# EAGLE board controller (EAGLE 9.6.0)
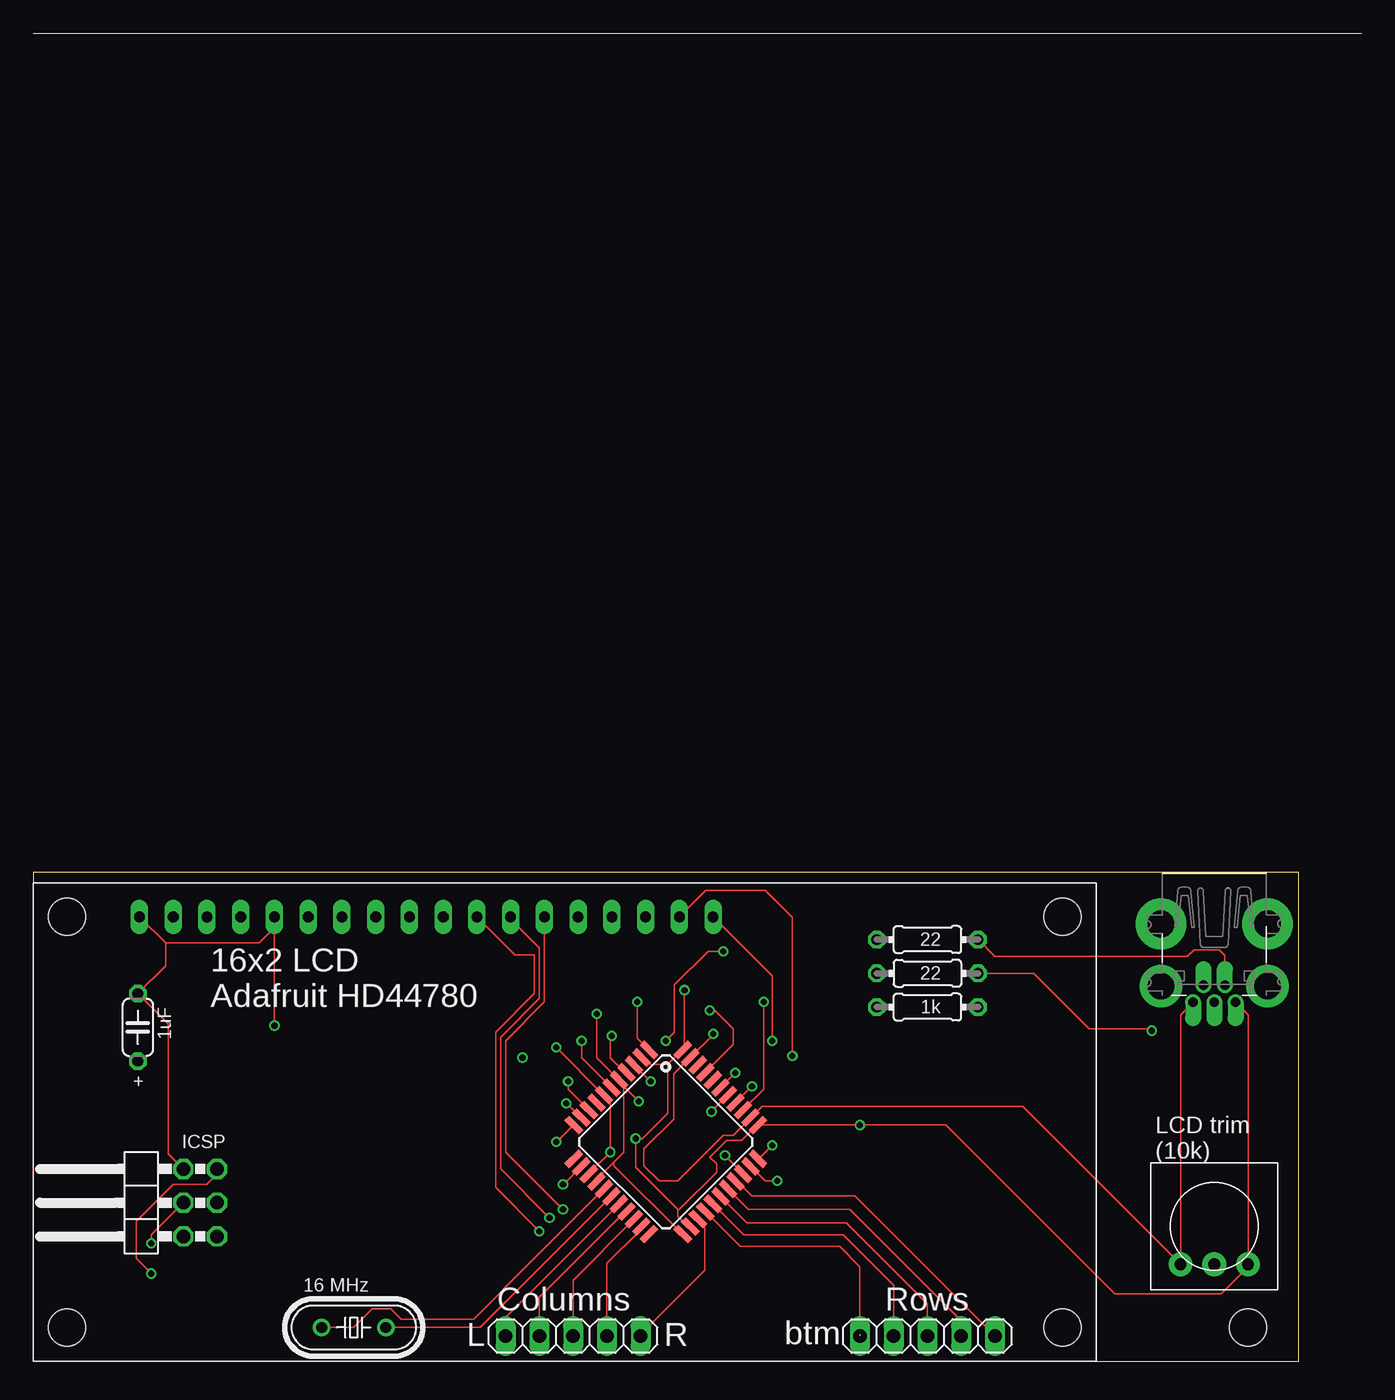
[diagram p0: board, top side]
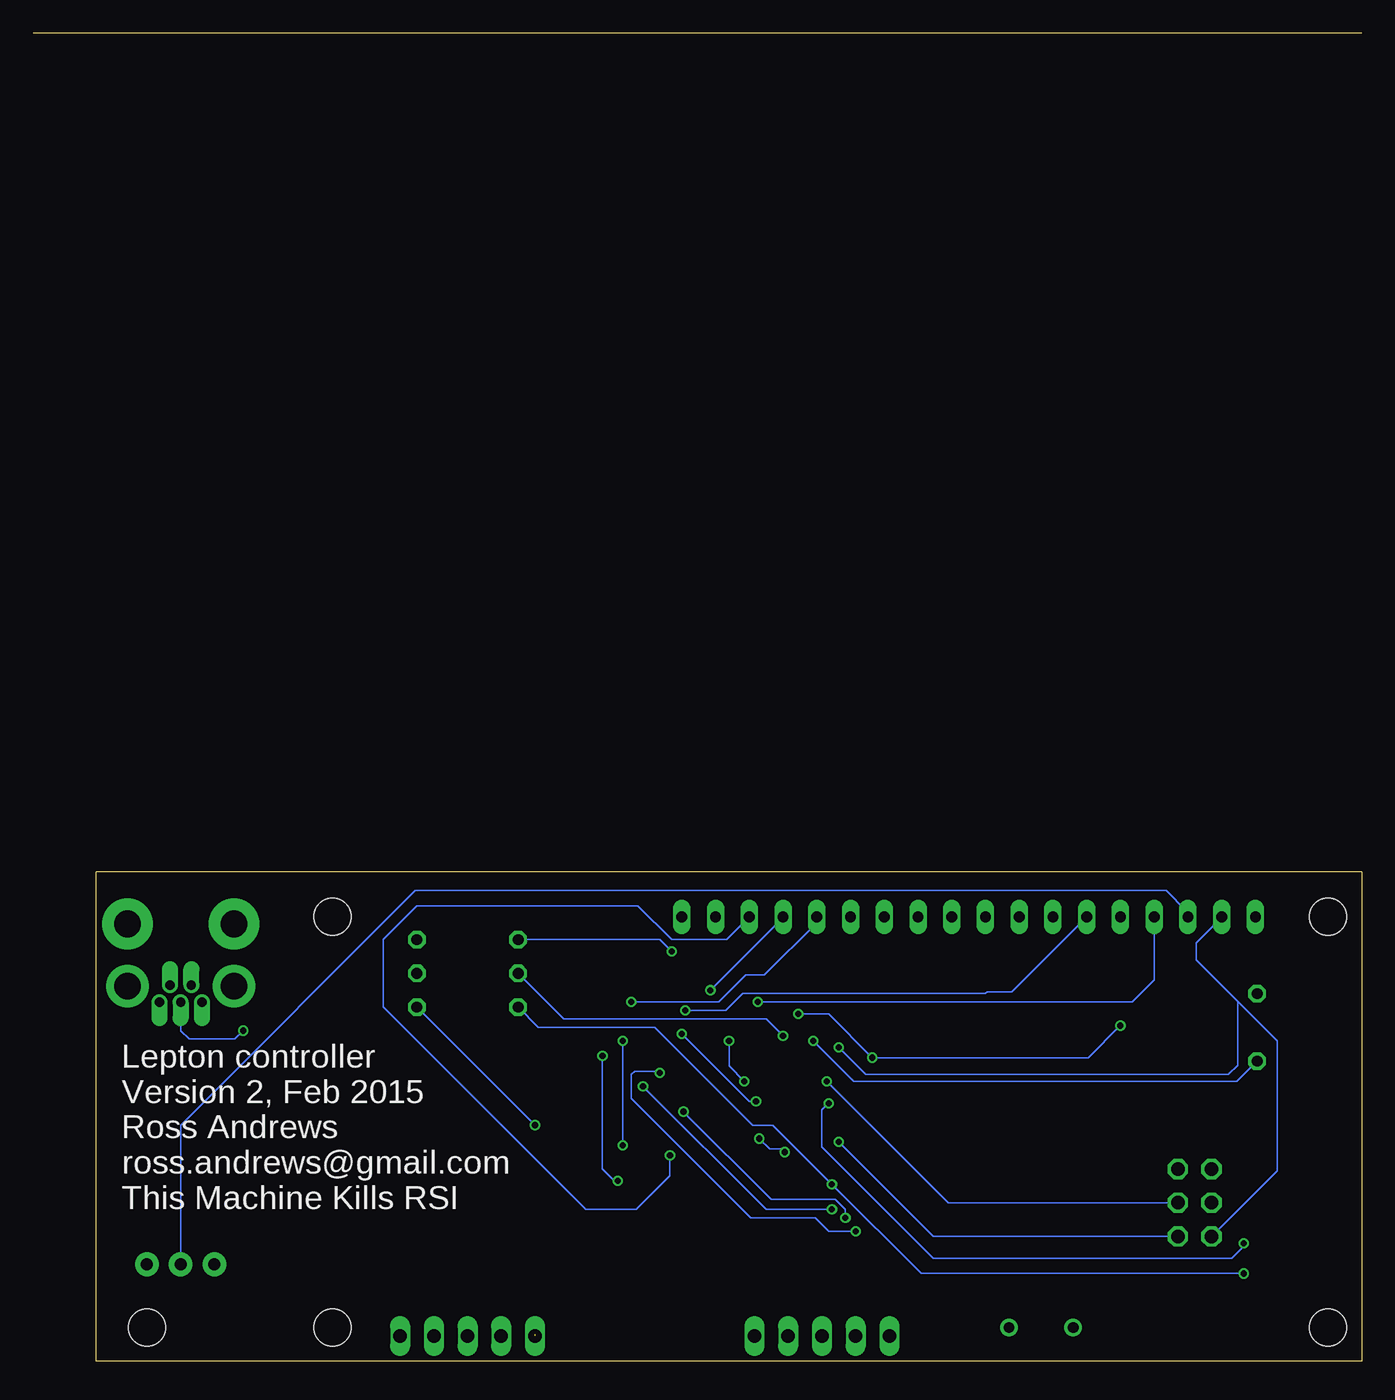
[diagram p1: board, bottom side, seen from below]

Size 100 x 100 mm. Coordinates in mm from the lower left corner, seen from the top.
Outline: 0,100 100,100
Outline: 0,0 95.25,0 95.25,36.83 0,36.83 0,0
Copper layers (1*16): Top 0.035mm / dielectric 1.5mm / Bottom 0.035mm
Design rules "dirt_cheap_dirty_boards.v1": minimum track width 5mil, minimum drill 12mil, track to track 5mil, track to pad 5mil, pad to pad 5mil, via to via 5mil, smd to smd 0mil, copper to edge 10mil, drill to drill 10mil, minimum pad ring 10mil, minimum via ring 6mil, stop-mask expansion 2mil, vias tented up to drill 25mil, thermal gap 10mil
Holes 2.8 mm at 91.44,2.54

## Footprints (pad centres in the part's own frame; a part is rotated, then mirrored left to right if it is on the bottom)
TRIM-3386 = drill 0.9 pad 1.778: 1 -2.54,-2.857; 2 0,-2.857; 3 2.54,-2.857
TQFP44 = smd 1.5 x 0.5: 1 -5.8,4; 2 -5.8,3.2; 3 -5.8,2.4; 4 -5.8,1.6; 5 -5.8,0.8; 6 -5.8,0; 7 -5.8,-0.8; 8 -5.8,-1.6; 9 -5.8,-2.4; 10 -5.8,-3.2; 11 -5.8,-4; 23 5.8,-4; 24 5.8,-3.2; 25 5.8,-2.4; 26 5.8,-1.6; 27 5.8,-0.8; 28 5.8,0; 29 5.8,0.8; 30 5.8,1.6; 31 5.8,2.4; 32 5.8,3.2; 33 5.8,4 | smd 0.5 x 1.5: 12 -4,-5.8; 13 -3.2,-5.8; 14 -2.4,-5.8; 15 -1.6,-5.8; 16 -0.8,-5.8; 17 0,-5.8; 18 0.8,-5.8; 19 1.6,-5.8; 20 2.4,-5.8; 21 3.2,-5.8; 22 4,-5.8; 34 4,5.8; 35 3.2,5.8; 36 2.4,5.8; 37 1.6,5.8; 38 0.8,5.8; 39 0,5.8; 40 -0.8,5.8; 41 -1.6,5.8; 42 -2.4,5.8; 43 -3.2,5.8; 44 -4,5.8
USB-MINIB-THM = drill 0.7 offset: D+ 0,9.8; D- -0.8,8.5; GND 1.6,9.8; ID 0.8,8.5; VBUS -1.6,9.8 | drill 2 pad 3.81: GND1 -4,3.9; GND4 4,3.9 | drill 2 pad 3.2: GND2 -4,8.6; GND3 4,8.6
LCD1602 = drill 0.8 long: 1 8,33.46; 2 10.54,33.46; 3 13.08,33.46; 4 15.62,33.46; 5 18.16,33.46; 6 20.7,33.46; 7 23.24,33.46; 8 25.78,33.46; 9 28.32,33.46; 10 30.86,33.46; 11 33.4,33.46; 12 35.94,33.46; 13 38.48,33.46; 14 41.02,33.46; 15 43.56,33.46; 16 46.1,33.46; 17 48.64,33.46; 18 51.18,33.46 | hole 2.8: 2.54,2.54; 2.54,33.46; 77.46,33.46; 77.46,2.54
0204/7 = drill 0.813 octagon: 1 -3.81,0; 2 3.81,0
C050-024X044 = drill 0.813 octagon: 1 -2.54,0; 2 2.54,0
HC49/S = drill 0.813: 1 -2.413,0; 2 2.413,0
2X03/90 = drill 1.016 octagon: 1 -2.54,-6.35; 2 -2.54,-3.81; 3 0,-6.35; 4 0,-3.81; 5 2.54,-6.35; 6 2.54,-3.81
1X05 = drill 1.016 long: 1 -5.08,0; 2 -2.54,0; 3 0,0; 4 2.54,0; 5 5.08,0

## Placement (x,y rotation side)
BACKLIGHT  [TRIM-3386]  88.9,10.16 0 top
E$1  [TQFP44]  47.62,16.51 315 top
E$2  [USB-MINIB-THM]  88.9,36.83 180 top
E$3  [LCD1602]  0,0 0 top
E$4  [0204/7]  67.31,29.21 180 top
E$5  [0204/7]  67.31,26.67 0 top
E$6  [0204/7]  67.31,31.75 0 top
E$7  [C050-024X044]  7.87,25.15 270 top
E$8  [HC49/S]  24.13,2.54 180 top
E$9  [2X03/90]  7.49,11.94 90 top
RIGHTBRD  [1X05]  40.64,1.91 180 top
ROWS  [1X05]  67.31,1.91 180 top

## Library data of the parts
BACKLIGHT E$2 E$7 E$8 = adafruit
E$1 = ref-packages
E$3 = adafruit-randrews
E$4-E$6 = resistor
E$9 RIGHTBRD ROWS = pinhead

## Nets
B_LED: E$1.33 E$3.18
COL11: E$1.18 RIGHTBRD.5
COL12: E$1.19 RIGHTBRD.4
COL13: E$1.20 RIGHTBRD.3
COL14: E$1.21 RIGHTBRD.2
COL15: E$1.25 RIGHTBRD.1
CONTRAST: BACKLIGHT.2 E$3.3
G_LED: E$1.32 E$3.17
GND: BACKLIGHT.1 E$1.5 E$1.15 E$1.23 E$1.35 E$1.43 E$2.GND E$3.1 E$3.5 E$7.1 E$9.6
LCD_DB4: E$1.39 E$3.11
LCD_DB5: E$1.38 E$3.12
LCD_DB6: E$1.37 E$3.13
LCD_DB7: E$1.36 E$3.14
LCD_EN: E$1.41 E$3.6
LCD_RS: E$1.1 E$3.4
R_LED: E$1.31 E$3.16
ROW1: E$1.30 ROWS.1
ROW2: E$1.29 ROWS.2
ROW3: E$1.28 ROWS.3
ROW4: E$1.27 ROWS.4
ROW5: E$1.26 ROWS.5
S$1: E$1.6 E$7.2
S$2: E$1.10 E$9.4
S$3: E$1.17 E$8.1
S$4: E$1.13 E$5.1 E$9.5
S$5: E$1.16 E$8.2
S$6: E$1.11 E$9.1
S$7: E$1.9 E$9.3
USB_DM: E$2.D- E$6.2
USB_DM_CHOKE: E$1.3 E$6.1
USB_DP: E$2.D+ E$4.1
USB_DP_CHOKE: E$1.4 E$4.2
VCC: BACKLIGHT.3 E$1.2 E$1.7 E$1.14 E$1.24 E$1.34 E$1.44 E$2.VBUS E$3.2 E$3.15 E$5.2 E$9.2

## Tracks (layer width: path | path; a pad name or v marks a point on that pad's centre or on a via)
B_LED  (via drill 0.46)
  Top 0.127: E$1.33 54.61,15.24 v55.63,16.26 | v55.63,24.13 55.63,29.01 E$3.18
  Bottom 0.127: v55.63,16.26 v55.63,24.13
COL11
  Top 0.127: RIGHTBRD.5 35.56,3.3 43.94,11.68 E$1.18
COL12
  Top 0.127: RIGHTBRD.4 38.1,4.83 44.45,11.18 E$1.19
COL13
  Top 0.127: RIGHTBRD.3 40.64,6.1 45.21,10.67 E$1.20
COL14
  Top 0.127: RIGHTBRD.2 43.18,7.37 45.72,9.91 E$1.21
COL15
  Top 0.127: E$1.25 50.04,10.67 50.55,10.16 50.55,6.86 45.72,2.03 RIGHTBRD.1
CONTRAST
  Bottom 0.127: E$3.3 13.21,33.53 13.21,33.91 14.73,35.43 71.25,35.43 88.9,17.78 BACKLIGHT.2 88.9,7.37
G_LED  (via drill 0.46)
  Top 0.127: E$1.32 54.03,14.67 55.12,13.59 v56.01,13.59 | v57.15,22.99 57.15,33.4 55.12,35.43 50.61,35.43 E$3.17
  Bottom 0.127: v56.01,13.59 56.26,13.59 57.15,14.48 v57.15,22.99
GND  (via drill 0.46)
  Top 0.127: 49.53,23.11 E$1.43 | 54.03,18.35 54.86,19.18 74.49,19.18 BACKLIGHT.1 86.36,26.09 E$2.GND | E$1.35 54.03,18.35 | E$1.23 48.77,9.65 43.69,14.73 43.69,14.99 | E$1.15 42.42,13.72 43.69,14.99 | 43.69,14.99 44.45,15.75 44.45,20.7 | E$3.1 9.96,31.5 | 9.96,31.5 17.02,31.5 18.16,32.64 E$3.5 v18.16,25.27 | 44.45,20.7 44.45,20.83 44.2,21.08 E$1.5 42.41,22.86 42.41,26.15 v42.42,26.16 | 44.45,20.7 v45.59,19.56 | 9.96,31.5 9.96,29.78 E$7.1 10.16,25.4 10.16,15.62 E$9.6 | 54.03,18.35 52.7,17.02 51.94,17.02 48.51,13.59 47.12,13.59 45.97,14.73 45.97,16 48.2,18.22 48.2,21.65 49.42,22.87 E$1.43 | 48.64,22.05 E$1.43 | v51.18,24.64 51.18,24.59 E$1.43
  Bottom 0.127: v45.59,19.56 46.1,19.56 v51.18,24.64 | v42.42,26.16 40.13,26.16 v36.83,22.86 20.57,22.86 v18.16,25.27
LCD_DB4  (via drill 0.46)
  Top 0.127: E$1.39 v52.83,21.72 | v38.1,9.78 34.8,13.08 34.8,24.77 37.72,27.69 37.72,30.61 36.25,30.61 E$3.11
  Bottom 0.127: v52.83,21.72 52.96,21.84 54.74,21.84 54.99,21.59 54.99,19.81 45.97,10.79 41.15,10.79 40.13,9.78 v38.1,9.78
LCD_DB5  (via drill 0.46)
  Top 0.127: E$1.38 v51.05,18.81 v51.05,18.8 | v38.86,10.79 35.18,14.48 35.18,24.38 38.1,27.3 38.1,31.11 35.94,33.27 E$3.12
  Bottom 0.127: v51.05,18.8 44.45,12.19 39.62,12.19 38.86,11.43 v38.86,10.79
LCD_DB6  (via drill 0.46)
  Top 0.127: E$1.37 54.08,20.7 v54.1,20.7 | v39.88,11.43 35.56,15.75 35.56,24.13 38.48,27.05 E$3.13
  Bottom 0.127: v54.1,20.7 44.83,11.43 v39.88,11.43
LCD_DB7  (via drill 0.46)
  Top 0.127: v54.99,27.05 54.99,20.48 E$1.36
  Bottom 0.127: v54.99,27.05 48.39,27.05 46.35,29.08 44.96,29.08 41.02,33.02 E$3.14
LCD_EN  (via drill 0.46)
  Top 0.127: v50.93,26.42 51.31,26.42 52.7,25.02 52.7,23.85 E$1.41
  Bottom 0.127: E$3.6 26.35,27.81 28.19,27.81 28.32,27.69 46.61,27.69 47.88,26.42 v50.93,26.42
LCD_RS  (via drill 0.46)
  Top 0.127: E$1.1 45.47,24.33 v45.47,27.05
  Bottom 0.127: v45.47,27.05 17.27,27.05 15.62,28.7 E$3.4
R_LED  (via drill 0.46)
  Top 0.127: E$1.31 53.42,14.14 v52.07,15.49
  Bottom 0.127: v52.07,15.49 52.07,13.97 54.61,11.43 58.42,11.43 73.66,26.67 73.66,31.75 71.12,34.29 54.48,34.29 51.94,31.75 47.81,31.75 E$3.16
ROW1
  Top 0.127: ROWS.1 61.85,12.45 54.1,12.45 53.01,13.54 E$1.30
ROW2
  Top 0.127: 52.32,12.95 E$1.29 53.84,11.43 61.47,11.43 69.85,3.05 ROWS.2
ROW3
  Top 0.127: 51.82,12.19 E$1.28 53.72,10.41 61.21,10.41 67.31,4.32 ROWS.3
ROW4
  Top 0.127: 51.31,11.68 E$1.27 53.48,9.53 60.96,9.53 64.77,5.71 ROWS.4
ROW5  (1 unrouted)
  Top 0.127: 50.8,11.18 E$1.26 53.24,8.64 60.71,8.64 62.23,7.11 62.23,2.03
S$1  (via drill 0.46)
  Top 0.127: E$1.6 | E$1.6 41.27,22.86 v41.27,24.13
  Bottom 0.127: v41.27,24.13 38.23,21.08 9.4,21.08 E$7.2
S$2  (via drill 0.46)
  Top 0.127: E$9.4 8.89,9.53 v8.89,8.89 | v40.13,19.43 40.18,19.43 E$1.10
  Bottom 0.127: v8.89,8.89 8.89,8.64 9.78,7.75 32.26,7.75 40.64,16.13 40.64,18.92 v40.13,19.43
S$3
  Top 0.127: E$8.1 33.66,2.54 E$1.17
S$4  (via drill 0.46)
  Top 0.127: E$1.13 39.92,13.34 v39.88,13.34 | E$9.5 13.84,14.1 13.08,13.34 10.54,13.34 7.75,10.54 7.75,7.75 v8.89,6.6
  Bottom 0.127: E$5.1 61.98,25.15 53.21,25.15 45.85,17.78 44.32,17.78 v39.88,13.34 33.15,6.6 v8.89,6.6
S$5
  Top 0.127: E$8.2 24.13,2.54 25.53,3.94 26.92,3.94 27.69,3.17 33.15,3.17 37.59,7.62 37.6,7.62 E$1.16
S$6  (via drill 0.46)
  Top 0.127: v39.37,16.51 39.42,16.51 E$1.11
  Bottom 0.127: E$9.1 32.26,9.4 v39.37,16.51
S$7  (via drill 0.46)
  Top 0.127: v40.26,21.08 40.26,20.48 E$1.9
  Bottom 0.127: E$9.3 31.11,11.94 v40.26,21.08
USB_DM
  Top 0.127: E$2.D- 89.7,30.57 89.28,30.99 87.38,30.99 86.87,30.48 72.39,30.48 E$6.2
USB_DM_CHOKE  (via drill 0.46)
  Top 0.127: v51.94,30.86 50.8,30.86 48.26,28.32 48.26,24.77 v47.62,24.13 | v46.48,21.08 46.45,21.08 E$1.3
  Bottom 0.127: E$6.1 52.83,31.75 v51.94,30.86 | v47.62,24.13 47.62,22.23 v46.48,21.08
USB_DP  (via drill 0.46)
  Top 0.127: E$4.1 75.31,29.21 79.5,25.02 84.07,25.02 v84.2,24.89
  Bottom 0.127: v84.2,24.89 84.84,24.26 88.27,24.26 88.9,24.89 E$2.D+
USB_DP_CHOKE  (via drill 0.46)
  Top 0.127: E$1.4 44.55,21.74 43.43,22.86 43.43,24.38 v43.56,24.51
  Bottom 0.127: E$4.2 60.07,25.78 44.83,25.78 v43.56,24.51
VCC  (via drill 0.46)
  Top 0.127: E$1.2 45.97,22.86 46.48,22.35 47.75,22.35 | 48.51,11.43 48.51,10.92 49.28,10.16 E$1.24 | v49.02,27.94 49.02,23.62 E$1.44 48.77,23.37 47.75,22.35 | E$2.VBUS 91.44,26.09 BACKLIGHT.3 91.44,7.11 89.41,5.08 81.41,5.08 68.7,17.78 v62.23,17.78 E$1.34 54.36,17.78 54.36,17.65 53.34,16.64 52.2,16.64 50.93,15.37 51.44,14.86 51.44,14.22 48.64,11.43 48.51,11.43 | E$1.14 41.91,14.22 v43.43,15.75 43.43,19.56 | 43.43,19.56 43.18,19.81 E$1.7 | E$1.7 42.93,20.07 v39.37,23.62 | E$1.7 43.43,19.57 43.43,19.56 | 47.75,22.35 47.75,18.67 45.85,16.76 v45.34,16.76 45.34,14.61 48.51,11.43
  Bottom 0.127: E$3.15 43.69,33.27 v49.02,27.94 | E$5.2 v62.23,17.78 | E$3.2 10.67,33.27 12.45,31.5 12.45,30.23 9.34,27.11 | v43.43,15.75 43.69,16 44.58,16 v45.34,16.76 | E$9.2 6.35,14.35 6.35,24.13 9.34,27.11 | v39.37,23.62 37.34,21.59 10.03,21.59 9.34,22.29 9.34,27.11

## Text on the board
tNames: 22 | 22 | 1uF | 16x2 LCD / Adafruit HD44780 | 1k | + | ICSP | LCD trim / (10k) | 16 MHz | Columns | Rows | L | R | btm
bNames: Lepton controller / Version 2, Feb 2015 / Ross Andrews / ross.andrews@gmail.com / This Machine Kills RSI